# Altium PCB ATRACK_HOST_V1.PcbDoc (part 1 of 3)
Units mm, origin at the board's own origin, x right, y up, seen from the top; angles counter-clockwise.
Board outline 156.4 x 87 mm, 2 copper layers (Top Layer, Bottom Layer); 274 components, 223 nets, 864 pads, 145 vias.
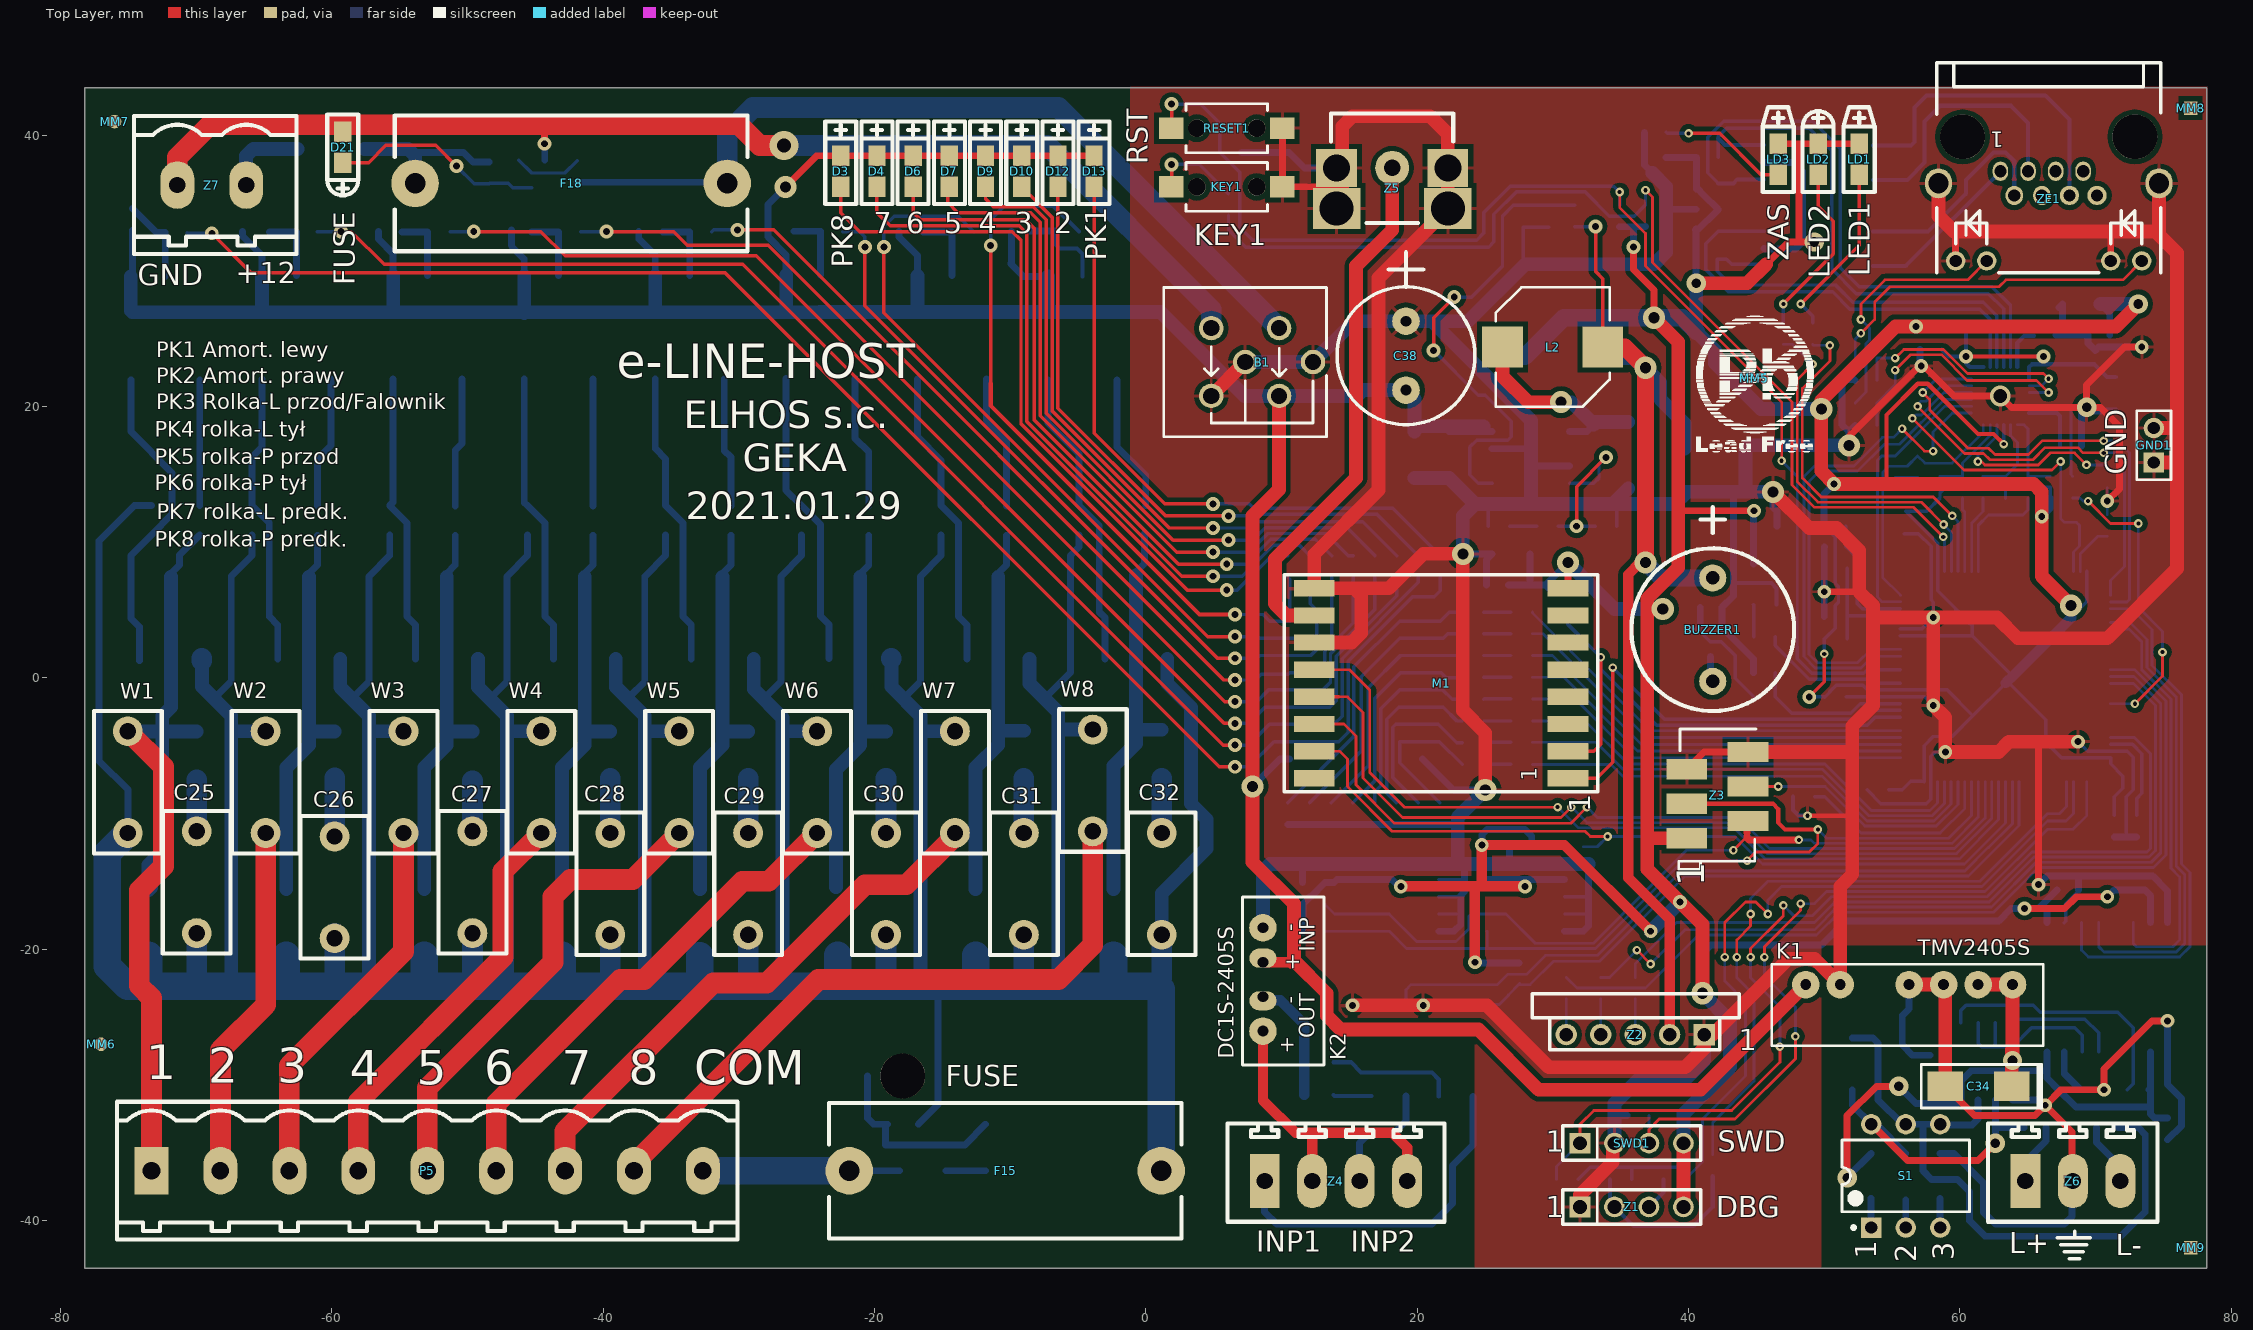
[diagram p0: Top Layer view]
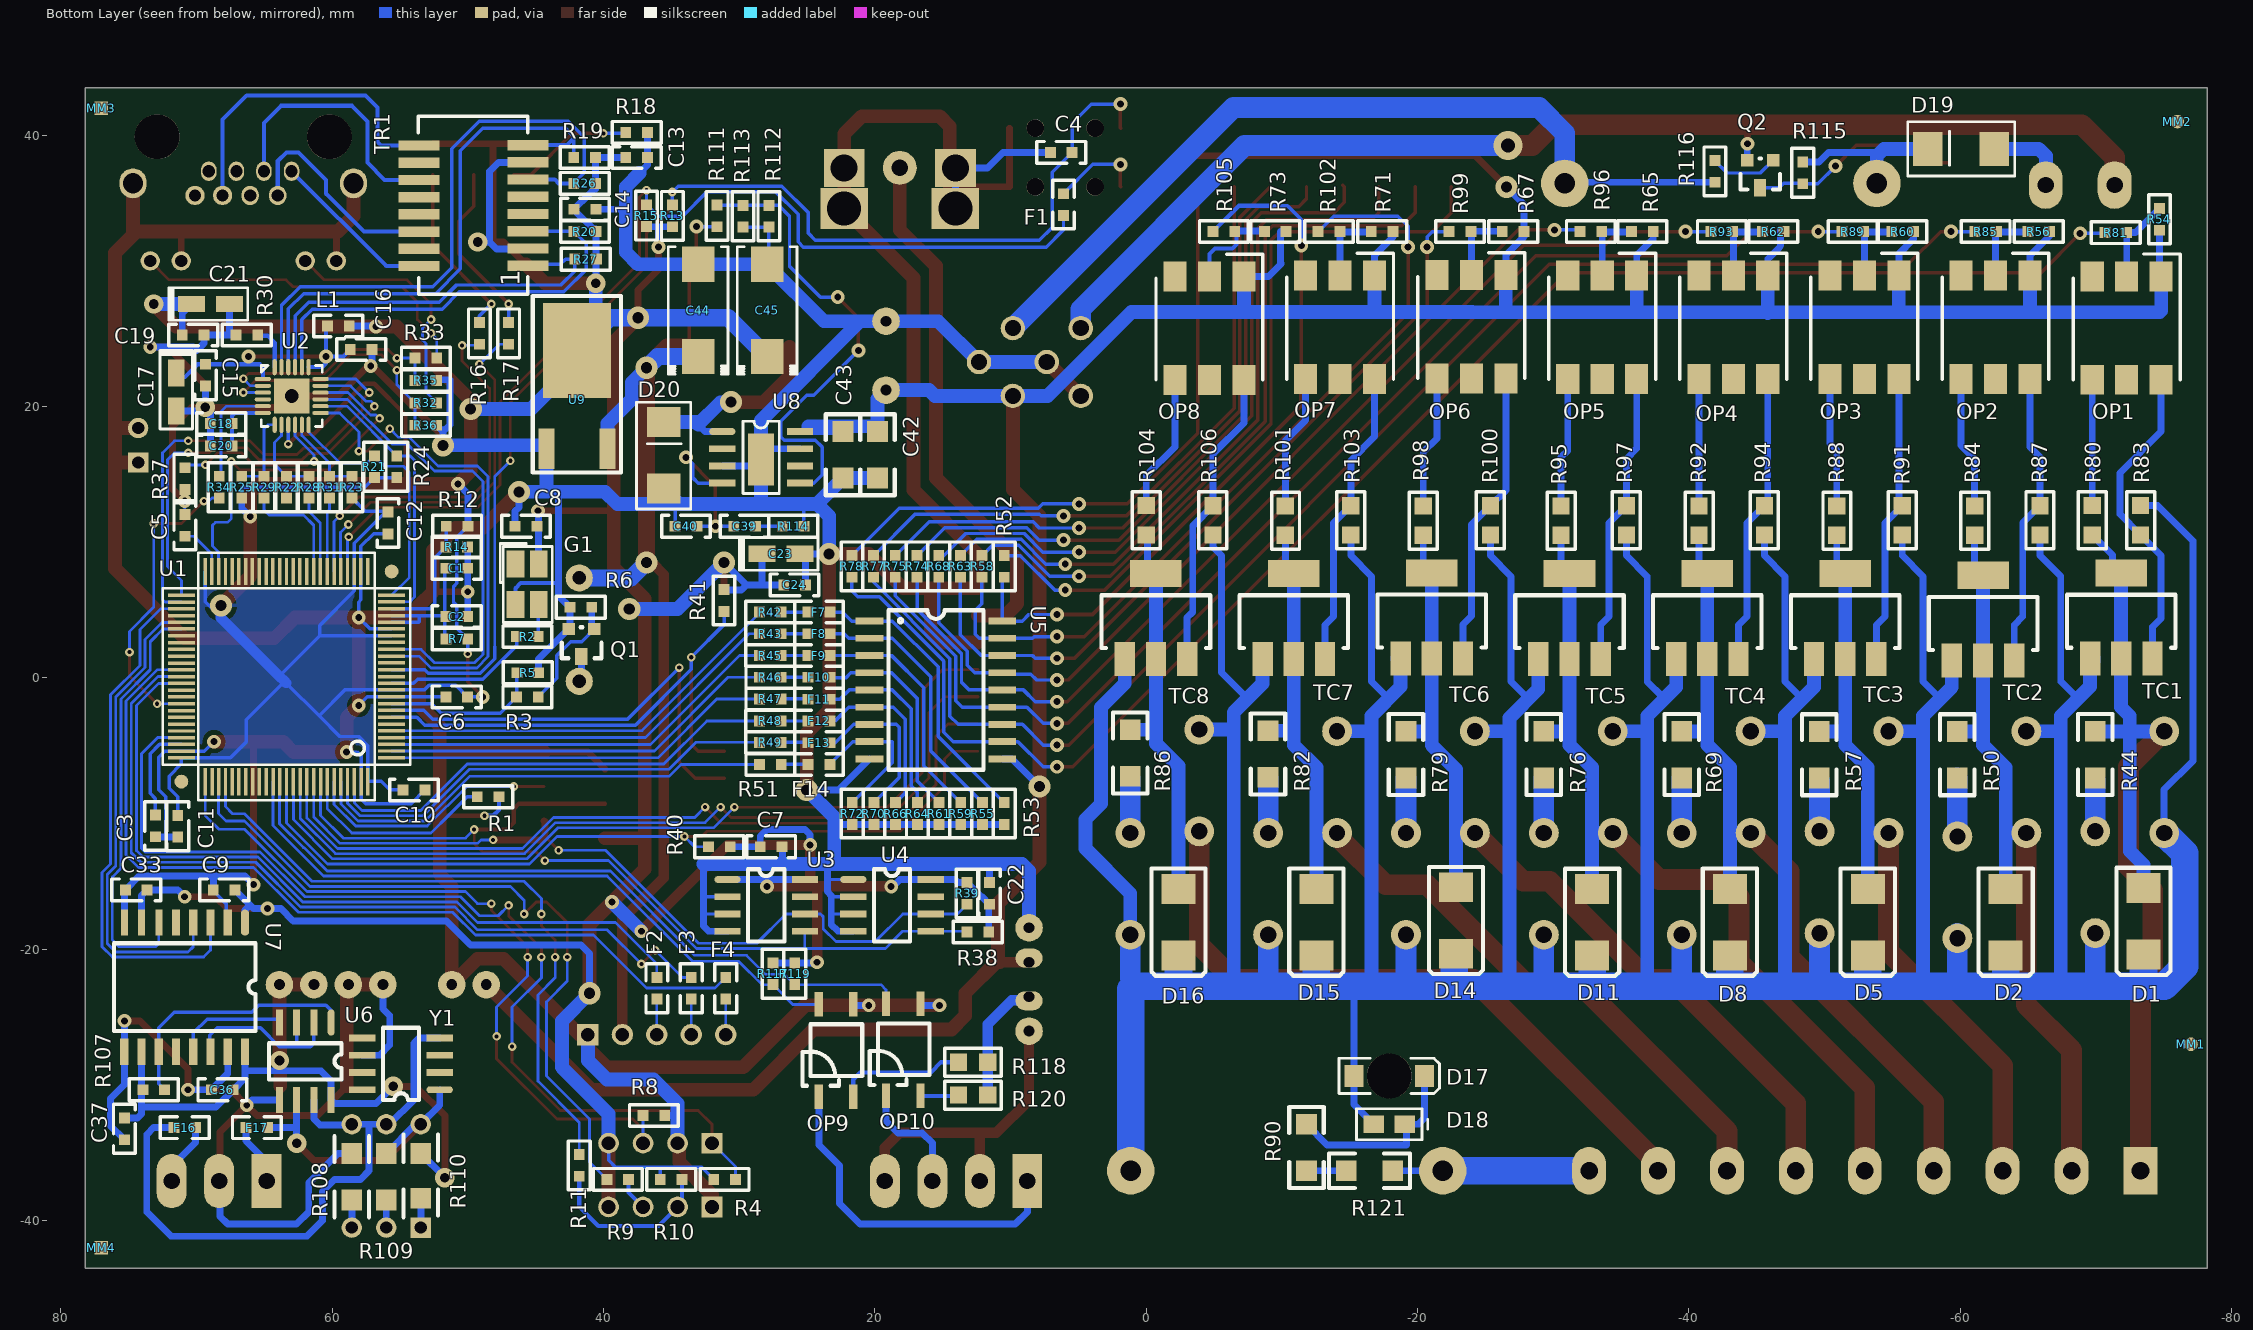
[diagram p1: Bottom Layer view, seen from below]

## Layer stack, top to bottom
Top Layer: signal copper 0.0356
Dielectric: dielectric 0.32, FR-4, Dk 4.8
Bottom Layer: signal copper 0.0356

## Board outline
-78.2,-43.5 -78.2,43.5 78.2,43.5 78.2,-43.5

## Design rules (kind name [scope] priority, off if disabled: settings)
Clearance Clear_Poly [InPolygon vs not InPolygon] p1: gap=0.356
Clearance Clear_INP [InNetClass('Class_INP') vs not InNetClass('Class_INP')] p2: gap=1.727
Clearance Clear_Relays [InNetClass('RELAYS') vs not InNetClass('RELAYS')] p3: gap=2.032
Clearance Clear_RS485 [InNetClass('Class_RS485') vs not InNetClass('Class_RS485')] p4: gap=2.54
Clearance [All] p5: gap=0.178
ComponentClearance [All] p1 off: gap=0.254 collisioncheckmode=3 verticalgap=0.254 showdistances=FALSE
DiffPairsRouting [All] p1: maxlimit=0.254 minlimit=0.254 mostfreqgap=0.254 maxuncoupledlength=12.7
Height [All] p1 off: minheight=0 maxheight=25.4 prefheight=12.7
HoleSize [All] p1: absolutevalues=TRUE maxlimit=5.08 minlimit=0.3 maxpercent=80.000 minpercent=20.000
MatchedLengths "Schematic Matched Net Lengths_1" [InNet('TD_P')] p1: tolerance=7.62 checknetsindiffpair=TRUE checkdiffpairvsdiffpair=TRUE checkothers=TRUE
MatchedLengths "Schematic Matched Net Lengths" [InNet('RD_N')] p2: tolerance=7.62 checknetsindiffpair=TRUE checkdiffpairvsdiffpair=TRUE checkothers=TRUE
MinimumSolderMaskSliver [All] p1: minsoldermaskwidth=0.102
PolygonConnect [All] p1: connectstyle=Relief reliefconductorwidth=0.254 reliefentries=4 polygonreliefangle="90 Angle"
RoutingVias [All] p1: holewidth=0.5 width=1.016 viastyle="Through Hole" minholewidth=0.3 minwidth=0.635 maxholewidth=5.08 maxwidth=5.08
SilkToSilkClearance [All] p1: silktosilkclearance=0.102
SilkscreenOverComponentPads [All] p1: minsilkscreentomaskgap=0.102
SolderMaskExpansion [All] p1: expansion=0.102
Width [All] p1: maxlimit=5.08 minlimit=0.203 preferedwidth=0.254 minimp=50.000000 maximp=50.000000 favimp=50.000000
21 further rules are at their usual default settings.

## Classes and differential pairs
net class Class_RS485: _NC1 _NC2 _NC3 _NC4 _NC5 _RS2 GND_I L+ L- NetF16_2 NetF17_2 NetR108_1 NetR109_1 NetR110_1 RXD1I TXD1I TXD_ENI VCC_I
net class ETHERNET: ERX+ ERX- ETH9 ETH10 ETH11 ETH12 ETH13 ETH14 ETH15 ETH16 ETX+ ETX-
net class RELAYS: _NC6 COM COM_W NetC25_1 NetC26_1 NetC27_1 NetC28_1 NetC29_1 NetC30_1 NetC31_1 NetC32_1 NetD17_A NetOP1_4 NetOP1_6 NetOP2_4 NetOP2_6 NetOP3_4 NetOP3_6 NetOP4_4 NetOP4_6 NetOP5_4 NetOP5_6 NetOP6_4 NetOP6_6 NetOP7_4 NetOP7_6 NetOP8_4 NetOP8_6 NetR90_1 QQ2 QQ4 QQ6 QQ8 QQ10 QQ12 QQ14 QQ16 ST1 ST2 ST3 ST4 ST5 ST6 ST7 ST8
net class Class_INP: NetK2_3 NetK2_4 NetOP9_1 NetOP9_2 NetOP10_1 NetOP10_2
differential pair RD: +RD_P -RD_N
differential pair TD: +TD_P -TD_N

## Components (designator, comment, footprint, x,y, rotation, side; value= is the part's Value field where it differs from the comment)
B1 "BNX002" BNX002 1.326,17.781 r180 top
BUZZER1 "BUZZER" BMT-1205H09B 41.783,7.366 r270 top locked
C1 "2u2" 0603C 51.704,8.077 r0 bottom
C2 "100n" 0603C 51.704,4.521 r0 bottom
C3 "2u2" 0603C 73.025,-11.811 r270 bottom
C4 "10n" 0603C 5.361,38.735 r180 bottom
C5 "2u2" 0603C 70.854,12.141 r90 bottom
C6 "100n" 0603C 49.911,-1.397 r180 bottom
C7 "100n" 0603C 28.548,-12.446 r0 bottom
C8 "100n" 0603C 44.809,11.176 r180 bottom
C9 "100n" 0603C 67.056,-15.621 r180 bottom
C10 "100n" 0603C 54.864,-8.255 r0 bottom
C11 "100n" 0603C 71.374,-10.033 r90 bottom
C12 "100n" 0603C 55.88,12.319 r90 bottom
C13 "100nF" 0603C 36.654,38.354 r180 bottom
C14 "100nF" 0603C 40.464,34.544 r180 bottom
C15 "100nF" 0603C 69.33,21.412 r270 bottom
C16 "100nF" 0603C 56.962,24.206 r180 bottom
C17 "10uF/6v3" CAP_A 71.489,19.679 r90 bottom
C18 "470pF" 0603C 69.076,18.745 r0 bottom
C19 "100nF" 0603C 69.342,25.273 r180 bottom
C20 "2.2uF" 0603C 69.076,17.094 r0 bottom
C21 "10uF/6v3" CAP_A 67.564,27.559 r0 bottom
C22 "100nF" 0603C 11.557,-16.786 r270 bottom
C23 "10u/6.3V" CAP_A 25.527,9.144 r0 bottom
C24 "100n" 0603C 25.019,6.858 r180 bottom
C25 "4n7/3kV" CAP_75 -69.945,-11.309 r90 top
C26 "4n7/3kV" CAP_75 -59.785,-11.69 r90 top
C27 "4n7/3kV" CAP_75 -49.625,-11.309 r90 top
C28 "4n7/3kV" CAP_75 -39.465,-11.429 r90 top
C29 "4n7/3kV" CAP_75 -29.305,-11.429 r90 top
C30 "4n7/3kV" CAP_75 -19.145,-11.429 r90 top
C31 "4n7/3kV" CAP_75 -8.985,-11.429 r90 top
C32 "4n7/3kV" CAP_75 1.175,-11.429 r90 top
C33 "100nF" 0603C 73.533,-15.621 r180 bottom
C34 "100uF/6v3" CAP_C 58.928,-30.099 r0 top
C36 "100nF" 0603C 67.183,-30.353 r180 bottom
C37 "100nF" 0603C 75.311,-32.336 r90 bottom
C38 "1000uF/25V" RB-.2/.4 19.177,26.289 r90 top
C39 "22nF" 0603C 28.702,11.176 r180 bottom
C40 "470p" 0603C 33.02,11.176 r180 bottom
C42 "4u7/25V" 1206#1 19.812,14.732 r270 bottom
C43 "4u7/25V" 1206#1 22.352,14.732 r270 bottom
C44 "470uF/16V" CAP_D 33.02,30.48 r90 bottom
C45 "470uF/16V" CAP_D 27.94,30.48 r90 bottom
D1 "P6SMB400CA-LF" RD5_U -73.501,-15.494 r90 bottom
D2 "P6SMB400CA-LF" RD5_U -63.341,-15.553 r90 bottom
D3 "LED1" 0805LB -22.479,38.481 r90 top
D4 "LED1" 0805LB -19.812,38.481 r90 top
D5 "P6SMB400CA-LF" RD5_U -53.181,-15.553 r90 bottom
D6 "LED1" 0805LB -17.145,38.481 r90 top
D7 "LED1" 0805LB -14.478,38.481 r90 top
D8 "P6SMB400CA-LF" RD5_U -43.021,-15.553 r90 bottom
D9 "LED1" 0805LB -11.811,38.481 r90 top
D10 "LED1" 0805LB -9.144,38.481 r90 top
D11 "P6SMB400CA-LF" RD5_U -32.861,-15.567 r90 bottom
D12 "LED1" 0805LB -6.477,38.481 r90 top
D13 "LED1" 0805LB -3.81,38.481 r90 top
D14 "P6SMB400CA-LF" RD5_U -22.828,-15.426 r90 bottom
D15 "P6SMB400CA-LF" RD5_U -12.541,-15.553 r90 bottom
D16 "P6SMB400CA-LF" RD5_U -2.381,-15.553 r90 bottom
D17 "LED1" LED_LAMP_1 -17.907,-29.337 r180 bottom
D18 "1N4148-0805" 0805D -16.764,-32.893 r0 bottom
D19 "MB1" RD5 -62.103,38.989 r0 bottom
D20 "SK26" RD5 35.56,14.351 r90 bottom
D21 "LED1" 0805LR -59.182,37.973 r270 top
F1 "BLM18BB141SN1D" 0603L#1 6.096,35.787 r90 bottom
F2 "BLM18AG102SN1D" 0603L#2 36.068,-21.971 r270 bottom
F3 "BLM18AG102SN1D" 0603L#2 33.528,-21.971 r270 bottom
F4 "BLM18AG102SN1D" 0603L#2 30.988,-21.971 r270 bottom
F7 "BLM18AG102SN1D" 0603L#1 25.017,4.851 r0 bottom
F8 "BLM18AG102SN1D" 0603L#1 25.017,3.251 r0 bottom
F9 "BLM18AG102SN1D" 0603L#1 25.017,1.651 r0 bottom
F10 "BLM18AG102SN1D" 0603L#1 25.017,0.051 r0 bottom
F11 "BLM18AG102SN1D" 0603L#1 25.017,-1.575 r0 bottom
F12 "BLM18AG102SN1D" 0603L#1 25.017,-3.175 r0 bottom
F13 "BLM18AG102SN1D" 0603L#1 25.017,-4.775 r0 bottom
F14 "BLM18AG102SN1D" 0603L#1 25.017,-6.375 r0 bottom
F15 "FX0321" FX300 1.143,-36.322 r180 top locked
F16 "BLM21A102SPT" 0603L#2 71.755,-33.147 r180 bottom
F17 "BLM21A102SPT" 0603L#2 64.643,-33.147 r0 bottom
F18 "FX0321" FX300 -53.848,36.449 r0 top locked
G1 "CFPS-72-8M" GEN_SMD1_1 46.482,8.382 r90 bottom
GND1 "Header 2" HDR1X2 74.295,15.875 r90 top
K1 "TMV2405S" DCDC-S1_D 48.641,-22.606 r0 top
K2 "DC1S-2405S" DCDC_SIL4 8.636,-18.415 r270 top locked
KEY1 "SW-PB" DTSM31N_2 5.969,36.195 r90 top locked
L1 "BLM18PG121SN1D" 0603L#1 60.44,25.933 r0 bottom
L2 "DER0705-15" DER0705_1 26.289,24.384 r0 top
LD1 "" 0805LG 52.578,39.37 r90 top
LD2 "" 0805LR 49.555,39.361 r90 top
LD3 "" 0805LG 46.609,39.37 r90 top
M1 "RFM69W" RFM69W 31.615,7.603 r180 top
MM1 "" REF_CIR -77,-27 r0 bottom
MM2 "" REF_CIR -76,41 r90 bottom
MM3 "" REF_SQR 77,42 r90 bottom
MM4 "" REF_SQR 77,-42 r90 bottom
MM5 "" PB_FREE_GRAF 44.831,22.098 r0 top
MM6 "" REF_CIR -77,-27 r270 top
MM7 "" REF_CIR -76,41 r270 top
MM8 "" REF_SQR 77,42 r270 top
MM9 "" REF_SQR 77,-42 r270 top
OP1 "MOC3081-SMD" SMD6-OP -74.803,29.591 r0 bottom
OP2 "MOC3081-SMD" SMD6-OP -65.129,29.647 r0 bottom
OP3 "MOC3081-SMD" SMD6-OP -55.469,29.647 r0 bottom
OP4 "MOC3081-SMD" SMD6-OP -45.809,29.647 r0 bottom
OP5 "MOC3081-SMD" SMD6-OP -36.149,29.647 r0 bottom
OP6 "MOC3081-SMD" SMD6-OP -26.503,29.697 r0 bottom
OP7 "MOC3081-SMD" SMD6-OP -16.829,29.647 r0 bottom
OP8 "MOC3081-SMD" SMD6-OP -7.197,29.577 r0 bottom
OP9 "TLP181" TLP181_1 24.13,-30.861 r0 bottom
OP10 "TLP181" TLP181_1 19.177,-30.803 r0 bottom
P5 "Header 9" ARC-9-5.08 -73.279,-36.322 r0 top
Q1 "BC817" SOT23-3Q 41.656,1.397 r270 bottom
Q2 "BC817" SOT23-3Q -45.212,35.941 r270 bottom
R1 "10k" 0603R 49.403,-8.763 r0 bottom
R2 "33R" 0603R 44.704,3.048 r180 bottom
R3 "100R" 0603R 44.704,-1.397 r180 bottom
R4 "10k" 0603R 31.977,-36.957 r0 bottom
R5 "1k" 0603R 46.482,0.381 r0 bottom
R6 "4k7" 0603R 40.767,5.207 r180 bottom
R7 "100R" 0603R 51.704,2.87 r0 bottom
R8 "10k" 0603R 35.384,-32.258 r180 bottom
R9 "33R" 0603R 38.051,-36.957 r180 bottom
R10 "10k" 0603R 34.114,-36.957 r180 bottom
R11 "33R" 0603R 41.783,-36.83 r270 bottom
R12 "10k" 0603R 51.689,11.176 r0 bottom
R13 "10k" 0603R 34.925,33.147 r270 bottom
R14 "1k" 0603R 49.911,9.652 r180 bottom
R15 "10k" 0603R 36.83,34.974 r90 bottom
R16 "4k7" 0603R 49.149,26.289 r90 bottom
R17 "4k7" 0603R 46.99,26.289 r90 bottom
R18 "4k7" 0603R 38.454,40.208 r0 bottom
R19 "50R" 0603R 42.291,38.354 r0 bottom
R20 "50R" 0603R 42.264,32.893 r0 bottom
R21 "4k7" 0603R 56.884,16.459 r90 bottom
R22 "4k7" 0603R 63.361,13.157 r270 bottom
R23 "4k7" 0603R 58.535,13.157 r270 bottom
R24 "4k7" 0603R 55.233,16.459 r90 bottom
R25 "4k7" 0603R 66.663,13.157 r270 bottom
R26 "50R" 0603R 42.291,36.449 r0 bottom
R27 "50R" 0603R 42.213,30.861 r0 bottom
R28 "33R" 0603R 61.71,13.159 r270 bottom
R29 "33R" 0603R 65.012,13.157 r270 bottom
R30 "12k1" 0603R 67.183,25.273 r0 bottom
R31 "33R" 0603R 60.186,13.157 r270 bottom
R32 "1k" 0603R 52.185,20.269 r180 bottom
R33 "1k" 0603R 52.185,23.571 r180 bottom
R34 "33R" 0603R 68.314,13.157 r270 bottom
R35 "10k" 0603R 52.185,21.92 r180 bottom
R36 "10k" 0603R 52.185,18.618 r180 bottom
R37 "4k7" 0603R 70.854,13.794 r270 bottom
R38 "4k7" 0603R 11.508,-18.72 r180 bottom
R39 "4k7" 0603R 13.208,-14.986 r90 bottom
R40 "10k" 0603R 32.358,-12.446 r0 bottom
R41 "10k" 0603R 31.115,6.604 r90 bottom
R42 "100R" 0603R 26.799,4.851 r180 bottom
R43 "100R" 0603R 26.799,3.251 r180 bottom
R44 "39R" 1206#1 -69.95,-3.94 r90 bottom
R45 "100R" 0603R 26.799,1.651 r180 bottom
R46 "100R" 0603R 26.797,0.051 r180 bottom
R47 "100R" 0603R 26.797,-1.549 r180 bottom
R48 "100R" 0603R 26.799,-3.175 r180 bottom
R49 "100R" 0603R 26.799,-4.75 r180 bottom
R50 "39R" 1206#1 -59.79,-3.948 r90 bottom
R51 "100R" 0603R 26.797,-6.375 r180 bottom
R52 "4k7" 0603R 10.465,9.117 r90 bottom
R53 "1k5" 0603R 10.465,-10.895 r270 bottom
R54 "4k7" 0603R -74.676,32.893 r270 bottom
R55 "1k5" 0603R 12.065,-10.895 r270 bottom
R56 "4k7" 0603R -66.675,32.893 r180 bottom
R57 "39R" 1206#1 -49.62,-3.943 r90 bottom
R58 "4k7" 0603R 12.09,9.117 r90 bottom
R59 "1k5" 0603R 13.665,-10.895 r270 bottom
R60 "4k7" 0603R -56.642,32.893 r180 bottom
R61 "1k5" 0603R 15.265,-10.895 r270 bottom
R62 "4k7" 0603R -47.117,32.893 r180 bottom
R63 "4k7" 0603R 13.691,9.117 r90 bottom
R64 "1k5" 0603R 16.866,-10.895 r270 bottom
R65 "4k7" 0603R -37.465,32.893 r180 bottom
R66 "1k5" 0603R 18.466,-10.895 r270 bottom
R67 "4k7" 0603R -27.94,32.893 r180 bottom
R68 "4k7" 0603R 15.291,9.117 r90 bottom
R69 "39R" 1206#1 -39.47,-3.94 r90 bottom
R70 "1k5" 0603R 20.066,-10.895 r270 bottom
R71 "4k7" 0603R -18.288,32.893 r180 bottom
R72 "1k5" 0603R 21.666,-10.895 r270 bottom
R73 "4k7" 0603R -10.414,32.893 r180 bottom
R74 "4k7" 0603R 16.891,9.117 r90 bottom
R75 "4k7" 0603R 18.491,9.117 r90 bottom
R76 "39R" 1206#1 -29.31,-3.94 r90 bottom
R77 "4k7" 0603R 20.091,9.117 r90 bottom
R78 "4k7" 0603R 21.692,9.117 r90 bottom
R79 "39R" 1206#1 -19.15,-3.94 r90 bottom
R80 "360R" 0805R -69.723,12.7 r270 bottom
R81 "1k" 0603R -70.563,32.817 r0 bottom
R82 "39R" 1206#1 -8.98,-3.901 r90 bottom
R83 "330R" 0805R -73.279,12.7 r270 bottom
R84 "360R" 0805R -61.055,12.673 r270 bottom
R85 "1k" 0603R -60.96,32.893 r0 bottom
R86 "39R" 1206#1 1.17,-3.82 r90 bottom
R87 "330R" 0805R -65.881,10.535 r90 bottom
R88 "360R" 0805R -50.895,12.673 r270 bottom
R89 "1k" 0603R -51.181,32.893 r0 bottom
R90 "47k" 1206#1 -11.806,-36.325 r270 bottom
R91 "330R" 0805R -55.721,10.535 r90 bottom
R92 "360R" 0805R -40.735,12.673 r270 bottom
R93 "1k" 0603R -41.529,32.893 r0 bottom
R94 "330R" 0805R -45.561,10.535 r90 bottom
R95 "360R" 0805R -30.575,12.673 r270 bottom
R96 "1k" 0603R -31.877,32.893 r0 bottom
R97 "330R" 0805R -35.401,10.535 r90 bottom
R98 "360R" 0805R -20.415,12.673 r270 bottom
R99 "1k" 0603R -22.225,32.893 r0 bottom
R100 "330R" 0805R -25.368,10.535 r90 bottom
R101 "360R" 0805R -10.255,12.673 r270 bottom
R102 "1k" 0603R -12.573,32.893 r0 bottom
R103 "330R" 0805R -15.081,10.535 r90 bottom
R104 "360R" 0805R 0,12.7 r270 bottom
R105 "1k" 0603R -4.826,32.893 r0 bottom
R106 "330R" 0805R -4.921,10.535 r90 bottom
R107 "10k" 0603R 74.041,-30.353 r0 bottom
R108 "470R" 1206#1 58.552,-38.484 r270 bottom
R109 "120R" 1206#1 56.012,-38.484 r270 bottom
R110 "470R" 1206#2 53.467,-38.354 r270 bottom
R111 "10k" 0603R 31.623,33.147 r270 bottom
R112 "3k3" 0603R 27.813,34.925 r90 bottom
R113 "100k" 0603R 29.718,34.925 r90 bottom
R114 "4k7" 0603R 26.924,11.176 r0 bottom
R115 "2k2" 0603R -48.387,36.322 r270 bottom
R116 "100k" 0603R -41.91,38.227 r90 bottom
R117 "4k7" 0603R 27.508,-22.706 r270 bottom
R118 "1k" 0805R 11.684,-28.321 r0 bottom
R119 "4k7" 0603R 25.908,-22.706 r270 bottom
R120 "1k" 0805R 11.684,-30.734 r0 bottom
R121 "47k" 1206#1 -18.164,-36.327 r180 bottom
RESET1 "SW-PB" DTSM31N_2 5.969,40.513 r270 top locked
S1 "SW DIP-3" DIP-6 56.007,-36.703 r90 top
SWD1 "ST-LINK" PIN4 32.004,-34.29 r0 top
TC1 "Z0103MN" SOT223 -71.864,1.427 r0 bottom
TC2 "Z0103MN" SOT223 -61.676,1.27 r0 bottom
TC3 "Z0103MN" SOT223 -51.516,1.391 r0 bottom
TC4 "Z0103MN" SOT223 -41.356,1.391 r0 bottom
TC5 "Z0103MN" SOT223 -31.196,1.391 r0 bottom
TC6 "Z0103MN" SOT223 -21.05,1.441 r0 bottom
TC7 "Z0103MN" SOT223 -10.876,1.391 r0 bottom
TC8 "Z0103MN" SOT223 -0.716,1.391 r0 bottom
TR1 "H1102NL" H1102 45.568,30.378 r270 bottom
U1 "STM32F427VGT6" VQ100_2 55.614,-5.893 r90 bottom
U2 "LAN8742A-CZ-TR" QFN24_LAN 62.98,20.777 r0 bottom
U3 "FM24CL64B-GTR" SO8 30.861,-14.859 r180 bottom
U4 "24AA256UID-I/SN" SO8 21.59,-14.859 r180 bottom
U5 "ULN2803A" SO-18 20.396,4.191 r90 bottom
U6 "MAX485" SO8 60.071,-25.4 r270 bottom
U7 "ADUM1401CRWZ" SMD16B 66.421,-18.034 r180 bottom
U8 "L5973D_2" SO8_M 31.242,18.161 r90 bottom
U9 "LD1117V33" DPAK 44.196,16.891 r0 bottom
W1 "JVR10N391K" CAP_75 -75.025,-11.429 r270 top
W2 "JVR10N391K" CAP_75 -64.865,-3.929 r90 top
W3 "JVR10N391K" CAP_75 -54.705,-3.929 r90 top
W4 "JVR10N391K" CAP_75 -44.545,-3.929 r90 top
W5 "JVR10N391K" CAP_75 -34.385,-3.929 r90 top
W6 "JVR10N391K" CAP_75 -24.225,-3.929 r90 top
W7 "JVR10N391K" CAP_75 -14.065,-3.929 r90 top
W8 "JVR10N391K" CAP_75 -3.905,-3.809 r90 top
Y1 "TPN3021" SO8 52.07,-30.353 r0 bottom
Z1 "DBG" PIN4 32.004,-38.989 r0 top
Z2 "NCDW-05" KEY_LOG 41.148,-26.289 r270 top
Z3 "Header 6" UMATCH-6SMD 39.878,-11.811 r90 top
Z4 "ZL-4" ARC-4-3.5-TYCO-1 8.763,-37.084 r0 top locked
Z5 "SMA-20" SMA-20_1 18.161,37.592 r180 top locked
Z6 "CON3" ARC-3-3.5-TYCO-1 64.826,-37.084 r0 top
Z7 "CON2" ARC-2-5.08-A1 -71.374,36.322 r0 top
ZE1 "WURTH 615 008 137 421" RJ45GELED 72.898,39.878 r180 top locked

## Footprints (in the part's own frame and the unit in brackets; to place one, negate y for a bottom-side part, rotate by r counter-clockwise, add the part's x,y. Pads: shape width x height; smd on the part's side, far side on the other; paste and mask are expansions set on the pad)
0603C [mm]
  rect 0.8x0.8 smd: 1(-0.1,0) 2(-1.7,0)
  silkscreen extent -2.7,-0.8 0.9,0.8
0603L#1 [mm]
  rect 0.8x0.8 smd: 1(-0.1,0) 2(-1.7,0)
  silkscreen extent -2.7,-0.8 0.9,0.8
0603L#2 [mm]
  rect 0.8x0.8 smd: 1(0.1,0) 2(1.7,0)
  silkscreen extent -0.9,-0.8 2.7,0.8
0603R [mm]
  rect 0.8x0.8 smd: 1(-0.1,0) 2(-1.7,0)
  silkscreen extent -2.7,-0.8 0.9,0.8
0805D [mil]
  rect 60x50 smd: A(0,0) K(-90,0)
  silkscreen extent -157,-45 50,45
0805LB [mil]
  rect 60x50 smd: A(0,0) K(-90,0)
  silkscreen extent -140,-45 100,45
0805LG [mil]
  rect 60x50 smd: A(0,0) K(-90,0)
  silkscreen extent -140,-45 106,45
0805LR [mil]
  rect 60x50 smd: A(0,0) K(-90,0)
  silkscreen extent -140,-45 95,45
0805R [mil]
  rect 50x50 smd: 1(0,0) 2(85,0)
  silkscreen extent -40,-40 125,41
1206#1 [mil]
  rect 60x60 smd: 1(-0.13,0.21) 2(-135.13,0.21)
  silkscreen extent -185,-50 50,50
1206#2 [mil]
  rect 60x60 smd: 1(-0.13,0.21) 2(-130,0)
  silkscreen extent -185,-50 50,50
ARC-2-5.08-A1 [mm]
  oval 2.5x3.5 hole 1.2: 1(0,0) 2(5.08,0)
  silkscreen extent -3.2,-5.08 8.79,5.08
ARC-3-3.5-TYCO-1 [mm]
  rect 2.2x4 hole 1.2: 1(0,0)
  oval 2.2x4 hole 1.2: 2(3.5,0) 3(7,0)
  silkscreen extent -2.75,-3 9.75,4.25
ARC-4-3.5-TYCO-1 [mm]
  rect 2.2x4 hole 1.2: 1(0,0)
  oval 2.2x4 hole 1.2: 2(3.5,0) 3(7,0) 4(10.5,0)
  silkscreen extent -2.75,-3 13.25,4.25
ARC-9-5.08 [mm]
  rect 2.5x3.5 hole 1.3: 1(0,0)
  oval 2.5x3.5 hole 1.3: 2(5.08,0) 3(10.16,0) 4(15.24,0) 5(20.32,0) 6(25.4,0) 7(30.48,0) 8(35.56,0) 9(40.64,0)
  silkscreen extent -2.54,-5.08 43.18,5.08
BMT-1205H09B [mm]
  round 2 hole 1: 1(0,0) 2(7.62,0)
  silkscreen extent -5.21,-6 9.81,6
BNX002 [mm]
  round 1.8 hole 1.2: B(-8.5,-8) CB(-8.5,-3) CG1(-3.5,-3) CG2(-6,-5.5) CG3(-11,-5.5) PSG(-3.5,-8)
  silkscreen extent -12,-11 0,0
CAP_75 [mm]
  round 2.2 hole 1.2: 1(0,0) 2(-7.5,0)
  silkscreen extent -9,-2.5 1.5,2.5
CAP_A [mm]
  rect 2x1.2 smd: 1(0,0) 2(2.8,0)
  silkscreen extent -1.34,-1.2 4.45,1.2
CAP_C [mm]
  rect 2.6x2.2 smd: 1(0,0) 2(4.9,0)
  silkscreen extent -1.78,-1.6 7.11,1.6
CAP_D [mm]
  rect 2.6x2.4 smd: 1(0,0) 2(-6.8,0)
  silkscreen extent -8.1,-2.2 1.3,2.2
DCDC-S1_D [mil]
  round 80 hole 31.5: 1(0,0) 2(100,0) 4(300,0) 5(400,0) 6(500,0) 7(600,0)
  silkscreen extent -98,-177 689,59
DCDC_SIL4 [mm]
  round 2.032 hole 0.8: 1(0,0) 4(7.62,0)
  oval 1.4x2 hole 0.8 copper offset -0.3,0: 2(2.54,0)
  oval 1.4x2 hole 0.8 copper offset 0.3,0: 3(5.08,0)
  silkscreen extent -2.26,-1.5 10.12,4.5
DER0705_1 [mm]
  rect 3x3 smd: 1(0,0) 2(7.4,0)
  silkscreen extent -0.5,-4.4 7.9,4.4
DIP-6 [mm] "DIP; 6 Leads; Row Spacing 7.62 mm; Pitch 2.54 mm"
  rect 1.5x1.5 hole 0.9: 1(-3.81,2.54)
  round 1.5 hole 0.9: 2(-3.81,0) 3(-3.81,-2.54) 4(3.81,-2.54) 5(3.81,0) 6(3.81,2.54)
  silkscreen extent -3.93,-4.7 2.65,4.7, body extent -3.55,-4.7 3.55,4.7, height 5.46
DPAK [mil]
  rect 47x118 smd: 1(0,0) 3(-177,0)
  rect 197x276 smd: 2(-88,-285)
  silkscreen extent -216,-443 40,69
DTSM31N_2 [mm]
  round 1.3 hole 1.3 mask+0: 0(0,2.2) 0(0,-2.2)
  rect 1.6x1.8 smd: 1(0,4.1) 2(0,-4.1)
  silkscreen extent -1.8,-3 1.8,3
FX300 [mm]
  round 3.5 hole 1.499: 1(0,0) 2(23,0)
  silkscreen extent -1.5,-5 24.5,5
GEN_SMD1_1 [mm]
  rect 2x1.3 smd: 1(0,0) 2(-2.972,0) 3(-2.972,-1.702) 4(0,-1.702)
  silkscreen extent -4.3,-2.7 1.52,1.12
H1102 [mm]
  rect 0.76x3 smd: 1(0,0) 2(-1.27,0) 3(-2.54,0) 4(-3.81,0) 5(-5.08,0) 6(-6.35,0) 7(-7.62,0) 8(-8.89,0) 9(-8.865,-8.026) 10(-7.595,-8.026) 11(-6.325,-8.026) 12(-5.055,-8.026) 13(-3.785,-8.026) 14(-2.515,-8.026) 15(-1.245,-8.026) 16(0.025,-8.026)
  silkscreen extent -11.02,-8.08 2.11,0
HDR1X2 [mm] "Connector; Header; 2 Position"
  rect 1.5x1.5 hole 0.9: 1(0,0)
  round 1.5 hole 0.9: 2(2.54,0)
  silkscreen extent -1.27,-1.27 3.81,1.27
KEY_LOG [mil]
  rect 62x62 hole 39.37: 1(0,0)
  round 62 hole 39.37: 2(0,-100) 3(0,-200) 4(0,-300) 5(0,-400)
  silkscreen extent -118,-498 43,102
LED_LAMP_1 [mm]
  round 3.3 hole 3.3 unplated mask+0: 0(0,0)
  rect 1.4x1.6 smd: A(2.6,0) K(-2.6,0)
  silkscreen extent -3.7,-1.3 3.7,1.3
PB_FREE_GRAF [mm]
  silkscreen extent -4.29,-5.46 4.43,4.59
PIN4 [mil]
  rect 60x60 hole 40: 1(0,0)
  round 60 hole 40: 2(100,0) 3(200,0) 4(300,0)
  silkscreen extent -50,-50 350,50
QFN24_LAN [mm]
  oval 1.2x0.3 smd mask+0.152: 1(2.125,-1.25) 2(2.125,-0.75) 3(2.125,-0.25) 4(2.125,0.25) 5(2.125,0.75) 6(2.125,1.25) 13(-2.125,1.25) 14(-2.125,0.75) 15(-2.125,0.25) 16(-2.125,-0.25) 17(-2.125,-0.75) 18(-2.125,-1.25)
  oval 0.3x1.2 smd mask+0.152: 7(1.25,2.125) 8(0.75,2.125) 9(0.25,2.125) 10(-0.25,2.125) 11(-0.75,2.125) 12(-1.25,2.125) 19(-1.25,-2.125) 20(-0.75,-2.125) 21(-0.25,-2.125) 22(0.25,-2.125) 23(0.75,-2.125) 24(1.25,-2.125)
  rect 2.6x2.6 smd mask+0.152: 25(0,0)
  silkscreen extent -2.25,-2.25 2.25,2.25
RB-.2/.4 [mil]
  round 80 hole 31.5: 1(0,0) 2(-200,0)
  silkscreen extent -300,-200 200,200
RD5 [mm]
  rect 2.2x2.5 smd: A(-0.4,0) K(4.5,0)
  silkscreen extent -1.91,-2 5.97,2
RD5_U [mm]
  rect 2.2x2.5 smd: A(0,0) K(-4.9,0)
  silkscreen extent -6.4,-2 1.5,2
REF_CIR [mm]
  round 1 smd paste-0.5 mask+0.5: 0(0,0)
REF_SQR [mm]
  rect 1x1 smd paste-0.5 mask+0.5: ""(0,0)
RFM69W [mm]
  rect 3x1.2 smd: 1(0.5,15) 2(0.5,13) 3(0.5,11) 4(0.5,9) 5(0.5,7) 6(0.5,5) 7(0.5,3) 8(0.5,1) 9(19.2,1) 10(19.2,3) 11(19.2,5) 12(19.2,7) 13(19.2,9) 14(19.2,11) 15(19.2,13) 16(19.2,15)
  silkscreen extent -1.7,0 21.4,16
RJ45GELED [mil]
  round 129.92 hole 129.92: 0(0,0) 0(500,0)
  oval 45x56 hole 35.43: 1(390,100) 3(310,100) 5(230,100) 7(150,100)
  oval 50x56 hole 35.43: 2(350,170) 4(270,170)
  round 56 hole 35.43: 6(190,170) 8(110,170) 9(520,360) 10(430,360) 11(70,360) 12(-20,360)
  oval 78.74x86.61 hole 59.06: G1(-70,135) G2(570,135)
  silkscreen extent -75,-215 575,395
SMA-20_1 [mm]
  round 2.5 hole 1.2: 1(0,0)
  rect 3.5x3 hole 2.5: G1(-4.1,3) G3(4.1,3)
  rect 3x2.8 hole 2: G2(-4.1,0) G4(4.1,0)
  silkscreen extent -4.5,-4 4.5,4.06
SMD6-OP [mm]
  rect 1.7x2.2 smd: 1(0,0) 2(2.54,0) 3(5.08,0) 4(5.08,7.62) 5(2.54,7.62) 6(0,7.62)
  silkscreen extent -1.4,-1.65 6.48,7.62
SMD16B [mil]
  oval 24x76 smd: 1(0,0)
  rect 24x76 smd: 2(-50,0) 3(-100,0) 4(-150,0) 5(-200,0) 9(-350,-375) 10(-300,-375) 11(-250,-375) 12(-200,-375) 13(-150,-375) 14(-100,-375) 15(-50,-375) 16(0,-375)
  rect 20x76 smd: 6(-250,0) 7(-300,0) 8(-350,0)
  silkscreen extent -380,-315 30,-60
SO8 [mil]
  oval 76x20 smd: 1(0,0)
  rect 76x20 smd: 2(0,-50) 3(0,-100) 4(0,-150) 5(225,-150) 6(225,-100) 7(225,-50) 8(225,0)
  silkscreen extent 60,-180 165,30
SO8_M [mil]
  oval 20x76 smd: 1(0,0)
  rect 20x76 smd: 2(-50,0) 3(-100,0) 4(-150,0) 5(-150,-225) 6(-100,-225) 7(-50,-225) 8(0,-225)
  rect 150x75 smd: 9(-81,-112)
  silkscreen extent -180,-165 30,-60
SO-18 [mil]
  rect 20x80 smd: 1(0,0) 2(-50,0) 3(-100,0) 4(-150,0) 5(-200,0) 6(-250,0) 7(-300,0) 8(-350,0) 9(-400,0) 10(-400,-385.83) 11(-350,-385.83) 12(-300,-385.83) 13(-250,-385.83) 14(-200,-385.83) 15(-150,-385.83) 16(-100,-385.83) 17(-50,-385.83) 18(0,-385.83)
  silkscreen extent -431,-331 31,-55
SOT23-3Q [mil]
  rect 36x36 smd: B(-87,39) E(-87,-36)
  rect 50x36 smd: C(-7,1)
  silkscreen extent -92,-56 -2,59
SOT223 [mm]
  rect 1.5x2.5 smd: 1(2.3,0) 2(0,0) 3(-2.3,0)
  rect 3.8x2 smd: 4(0,-6.3)
  silkscreen extent -4,-4.7 4,-0.8
TLP181_1 [mm]
  rect 0.6x1.8 smd: 1(0,0) 2(-2.54,0) 3(-2.54,-6.8) 4(0,-6.8)
  silkscreen extent -3.2,-5.33 1.2,-0.8
UMATCH-6SMD [mm]
  rect 1.5x3 smd: 1(0,0) 2(1.27,-4.5) 3(2.54,0) 4(3.81,-4.5) 5(5.08,0) 6(6.35,-4.5)
  silkscreen extent -2.3,-5.1 8.05,0.6
VQ100_2 [mil]
  rect 10x79 smd mask+6: 1(0,0) 2(20,0) 3(39,0) 4(59,0) 5(79,0) 6(98,0) 7(118,0) 8(138,0) 9(157,0) 10(177,0) 11(197,0) 12(216,0) 13(236,0) 14(256,0) 15(276,0) 16(295,0) 17(315,0) 18(335,0) 19(354,0) 20(374,0) 21(394,0) 22(413,0) 23(433,0) 24(453,0) 25(472,0) 51(472,610) 52(452,610) 53(433,610) 54(413,610) 55(393,610) 56(374,610) 57(354,610) 58(334,610) 59(315,610) 60(295,610) 61(275,610) 62(256,610) 63(236,610) 64(216,610) 65(196,610) 66(177,610) 67(157,610) 68(137,610) 69(118,610) 70(98,610) 71(78,610) 72(59,610) 73(39,610) 74(19,610) 75(0,610)
  rect 79x10 smd mask+6: 26(541,69) 27(541,89) 28(541,108) 29(541,128) 30(541,148) 31(541,167) 32(541,187) 33(541,207) 34(541,226) 35(541,246) 36(541,266) 37(541,285) 38(541,305) 39(541,325) 40(541,345) 41(541,364) 42(541,384) 43(541,404) 44(541,423) 45(541,443) 46(541,463) 47(541,482) 48(541,502) 49(541,522) 50(541,541) 76(-69,541) 77(-69,521) 78(-69,502) 79(-69,482) 80(-69,462) 81(-69,443) 82(-69,423) 83(-69,403) 84(-69,384) 85(-69,364) 86(-69,344) 87(-69,325) 88(-69,305) 89(-69,285) 90(-69,265) 91(-69,246) 92(-69,226) 93(-69,206) 94(-69,187) 95(-69,167) 96(-69,147) 97(-69,128) 98(-69,108) 99(-69,88) 100(-69,69)
  round 40 smd: 101(541,0) 102(-68.9,610)
  silkscreen extent -123,-54 595,664

## Part data
C1 C2 C3 C4 C5 C6 C7 C8 C9 C10 C11 C12 C22 C24 C39 C40: library part CAP, "Capacitor"
C13 C14 C15 C16 C19: library part Cap_100nF_X7R_10%_0402, "Capacitor,100nF,16V,X7R,10%,0402,YAGEO"
C17 C21: library part CapTantal
C18: library part Cap_470pF_X7R_10%_0402, "Capacitor,470pF,16V,X7R,10%,0402,YAGEO"
C20: library part Cap_1uF_X5R_10%_0603, "Capacitor,1uF,16V,X5R,10%,0603,YAGEO"
C23 C34 C38 C44 C45: library part CAP_TANTAL_SMD, "KONDENSATOR ELEKTROLITYCZNY TANTALOWY SMD"
C25 C26 C27 C28 C29 C30 C31 C32 C33 C36 C37 C42 C43: library part CAP
D1 D2 D5 D8 D11 D14 D15 D16: library part TRANSIL
D18: library part DIODE1, "Diode"
D19: library part Diode, "Default Diode"
D20: library part "DIODE SCHOTTKY", "Schottky Diode"
F1 F2 F3 F4 F7 F8 F9 F10 F11 F12 F13 F14 F16 F17: library part KORALIK, "Koralik ferrytowy"
F15 F18: library part FUSE1, "Fuse"
G1: library part GENER_SMD
GND1: "Header, 2-Pin"
K1: library part NMV0505S_D
K2: library part DCDC_AM1S
L1: library part BEAD_120R_2A_0603, "Bead,120R,2A,0603,BLM18PG121SN1D,MURATA"
L2: library part CEWKA_1
LD1 LD2 LD3: library part LED
M1: library part RFM96W
MM1 MM2 MM3 MM4 MM5 MM6 MM7 MM8 MM9: library part MECH
OP1 OP2 OP3 OP4 OP5 OP6 OP7 OP8: library part MOC3041
OP9 OP10: library part TLP621, "Optoisolator"
P5: "Header, 9-Pin"
Q1 Q2: library part NPN-SOT23, "NPN Transistor"
R1 R2 R4 R7 R8 R9 R10 R11 R12 R13 R14 R15 R16 R17 R18 R19 R20 R21 R22 R23 R24 R25 R26 R27 R28 R29 R30 R31 R32 R33 R34 R35 R36 R37 R38 R39 R40 R41 R42 R43 R44 R45 R46 R47 R48 R49 R50 R51 R52 R53 R54 R55 R56 R57 R58 R59 R60 R61 R62 R63 R64 R65 R66 R67 R68 R69 R70 R71 R72 R73 R74 R75 R76 R77 R78 R79 R80 R81 R82 R83 R84 R85 R86 R87 R88 R89 R90 R91 R92 R93 R94 R95 R96 R97 R98 R99 R100 R101 R102 R103 R104 R105 R106 R107 R108 R109 R110 R111 R112 R113 R114 R115 R116 R117 R118 R119 R120 R121: library part RES3
R3 R5 R6: library part R
S1: "DIP Switch, 3 Position, SPST"
SWD1: library part SW_CON, "Header, 4-Pin"
U1: library part STM32F427_LQFP100
U2: "LAN8742A-CZ-TR - Small Footprint RMII 10/100 Ethernet, Transceiver with HP Auto-MDIX and flexPWR Technology SQFN-24"
U3 U4: library part AT24C02
U5: library part Pro31.tmp_ULN2803A_42
U6: library part MAX485_1
U7: library part ADUM1401
W1 W2 W3 W4 W5 W6 W7 W8: library part RES4
Z1: library part "Header 4", "Header, 4-Pin"
Z2: library part CON5, "Connector"
Z3: "Micro Match 6"
Z6: library part ZL-3
Z7: "Connector"
ZE1: library part RJ45GELED

## Via types
v1: diameter 1.016, hole 0.508, Top Layer to Bottom Layer, tented both sides, 58 vias
v2: diameter 0.635, hole 0.305, Top Layer to Bottom Layer, tented both sides, 39 vias
v3: diameter 0.635, hole 0.3, Top Layer to Bottom Layer, tented both sides, 18 vias
v4: diameter 1.626, hole 0.813, Top Layer to Bottom Layer, tented both sides, 15 vias
v5: diameter 1.422, hole 0.711, Top Layer to Bottom Layer, tented both sides, 7 vias
v6: diameter 1.016, hole 0.5, Top Layer to Bottom Layer, tented both sides, 5 vias
v7: diameter 2.134, hole 1.016, Top Layer to Bottom Layer, tented both sides, 1 vias
v8: diameter 1.524, hole 1, Top Layer to Bottom Layer, tented both sides, 1 vias
v9: diameter 1.422, hole 0.7, Top Layer to Bottom Layer, tented both sides, 1 vias

## Nets (pads, with @x,y where several pads share a name; then routed paths per layer and width w, separated by ;. In a path a pad name is that pad's centre, name@x,y a point inside that pad or via, vN(x,y) a via of type N, cw(c..) or ccw(c..) an arc to the next point about the centre after c; other vN are vias at no path point)
/RST: C4.1 R13.2 RESET1.2 U1.14 | length 94.3
  Top Layer w0.203: v2(34.925,35.814) 34.925,34.671 36.83,32.766 36.83,30.353 46.863,20.32 v2(46.863,16.002)
  Top Layer w0.254: RESET1.2@1.869,40.513 1.905,40.549 v1(1.905,42.291)
  Bottom Layer w0.203: v2(46.863,16.002) 48.006,14.859 48.006,2.286
  Bottom Layer w0.254: v1(1.905,42.291) 4.064,42.291 5.461,40.894 C4.1@5.461,38.735 6.936,37.26 6.936,33.196 7.874,32.258 24.384,32.258 24.892,32.766 24.892,34.29 26.848,36.246 34.493,36.246 v2(34.925,35.814) R13.2@34.925,34.847 ; 48.006,2.286 48.006,1.397 49.073,0.33 52.908,0.33 53.188,0.61 U1.14@55.614,0.61
_NC1: Y1.2
_NC2: Y1.3
_NC3: Y1.5
_NC4: Y1.7
_NC5: Y1.8
_NC6: D17.0
_RS2: U7.12
ANT: M1.10 Z5.1 | length 39
  Top Layer w1.016: M1.10@12.415,4.603 10.383,4.603 9.525,5.461 9.525,8.763 15.494,14.732 15.494,30.353 18.161,33.02 Z5.1@18.161,37.592
BOOT0: R1.1 U1.94 | length 14.9
  Bottom Layer w0.203: 51.943,-10.668 52.705,-11.43 58.547,-11.43 60.364,-9.613 U1.94@60.364,-7.645
  Bottom Layer w0.254: R1.1@49.303,-8.763 50.038,-8.763 51.943,-10.668
BUZZER: R3.2 R5.1 U1.9 | length 11.8
  Bottom Layer w0.254: R5.1@46.382,0.381 46.382,-1.375 R3.2@46.404,-1.397 47.623,-2.616 51.943,-2.616 52.654,-1.905 U1.9@55.614,-1.905
CLK: R2.2 U1.12 | length 11
  Bottom Layer w0.254: R2.2@46.404,3.048 46.404,2.388 48.894,-0.102 53.696,-0.102 54,-0.406 U1.12@55.614,-0.406
COM: C25.2 C26.2 C27.2 C28.2 C29.2 C30.2 C31.2 C32.2 D1.K D2.K D5.K D8.K D11.K D14.K D15.K D16.K D17.K D18.A F15.1 R83.1 R87.1 R91.1 R94.1 R97.1 R100.1 R103.1 R106.1 TC1.1 TC2.1 TC3.1 TC4.1 TC5.1 TC6.1 TC7.1 TC8.1 W1.1 W2.1 W3.1 W4.1 W5.1 W6.1 W7.1 W8.1 | length 494.6
  Bottom Layer w0.508: W1.1@-75.025,-11.429 -75.025,-8.236 -77.141,-6.12 -77.141,10.108 -74.549,12.7 R83.1@-73.279,12.7 ; -68.548,-1.403 -67.405,-0.26 -67.405,7.487 -65.881,9.011 R87.1@-65.881,10.535 ; -58.388,-1.403 -57.245,-0.26 -57.245,7.487 -55.721,9.011 R91.1@-55.721,10.535 ; -48.228,-1.403 -47.085,-0.26 -47.085,7.487 -45.561,9.011 R94.1@-45.561,10.535 ; -38.068,-1.403 -36.925,-0.26 -36.925,7.487 -35.401,9.011 R97.1@-35.401,10.535 ; -28.035,-1.403 -26.892,-0.26 -26.892,7.487 -25.368,9.011 R100.1@-25.368,10.535 ; -17.748,-1.403 -16.605,-0.26 -16.605,7.487 -15.081,9.011 R103.1@-15.081,10.535 ; D18.A@-16.764,-32.893 -15.307,-31.436 D17.K@-15.307,-29.337 -15.307,-22.806 -15.24,-22.739 ; -7.477,-1.514 -5.556,0.406 -5.556,9.011 -4.921,9.646 R106.1@-4.921,10.535
  Bottom Layer w1.016: TC1.1@-69.564,1.264 -69.564,-0.641 -67.405,-2.8 -67.405,-22.688 ; -67.398,-3.929 W2.1@-64.865,-3.929 ; TC2.1@-59.376,1.391 TC2.1@-59.376,1.27 -59.376,-0.669 -57.245,-2.8 -57.245,-22.663 -57.321,-22.739 ; -57.238,-3.929 W3.1@-54.705,-3.929 ; TC3.1@-49.216,1.391 -49.216,-0.669 -47.085,-2.8 -47.085,-22.739 ; -47.078,-3.929 W4.1@-44.545,-3.929 ; TC4.1@-39.056,1.391 -39.056,-0.669 -36.925,-2.8 -36.925,-22.739 ; -36.918,-3.929 W5.1@-34.385,-3.929 ; TC5.1@-28.896,1.391 -28.896,-0.821 -26.765,-2.952 -26.765,-22.663 -26.689,-22.739 ; -26.758,-3.929 W6.1@-24.225,-3.929 ; TC6.1@-18.75,1.441 -18.75,-0.655 -16.605,-2.8 -16.605,-22.663 -16.529,-22.739 ; -16.598,-3.929 W7.1@-14.065,-3.929 ; TC7.1@-8.576,1.391 -8.576,-0.415 -7.477,-1.514 -6.445,-2.546 -6.445,-22.739 ; -6.438,-3.809 W8.1@-3.905,-3.809 ; C32.2@1.175,-18.929 1.175,-15.881 4.477,-12.579 4.477,-10.42 3.334,-9.277 3.334,-2.165 1.584,-0.415 TC8.1@1.584,1.391
  Bottom Layer w1.524: -69.945,-21.977 C25.2@-69.945,-18.929 ; TC1.1@-69.564,1.264 TC1.1@-69.564,1.427 ; -59.785,-22.612 C26.2@-59.785,-19.19 C26.2@-59.785,-18.823 ; -49.625,-22.739 C27.2@-49.625,-18.929 ; -39.465,-22.612 C28.2@-39.465,-18.929 ; -29.305,-22.612 C29.2@-29.305,-18.929 ; -19.145,-22.739 C30.2@-19.145,-18.929 ; TC6.1@-18.764,1.427 TC6.1@-18.75,1.441 ; -8.985,-22.739 C31.2@-8.985,-18.929 ; 1.175,-22.104 C32.2@1.175,-18.929
  Bottom Layer w2.032: W1.1@-75.025,-11.429 -76.529,-12.933 -76.529,-21.235 -75.025,-22.739 -73.501,-22.739 ; D1.K@-73.501,-20.453 -73.501,-22.739 ; D2.K@-63.341,-20.453 -63.341,-22.739 ; D5.K@-53.181,-20.453 -53.181,-22.739 ; D8.K@-43.021,-20.453 -43.021,-22.739 ; D11.K@-32.861,-20.467 -32.861,-22.739 ; D14.K@-22.701,-20.453 -22.701,-22.739 ; D15.K@-12.541,-20.453 -12.541,-22.739 ; D16.K@-2.381,-20.453 -2.381,-22.739 ; F15.1@1.143,-36.322 1.143,-22.961 0.921,-22.739 -2.381,-22.739 ; -73.501,-22.739 -63.341,-22.739 ; -63.341,-22.739 -57.321,-22.739 -53.181,-22.739 ; -53.181,-22.739 -49.625,-22.739 -47.085,-22.739 -43.021,-22.739 ; -43.021,-22.739 -36.925,-22.739 -32.861,-22.739 ; -32.861,-22.739 -26.689,-22.739 -22.701,-22.739 ; -22.701,-22.739 -19.145,-22.739 -16.529,-22.739 -15.24,-22.739 -12.541,-22.739 ; -12.541,-22.739 -8.985,-22.739 -6.445,-22.739 -2.381,-22.739
COM_W: F15.2 P5.9 R121.1 | length 14.5
  Bottom Layer w0.508: F15.2@-21.857,-36.322 R121.1@-18.161,-36.322
  Bottom Layer w2.032: P5.9@-32.639,-36.322 F15.2@-21.857,-36.322
CS_R: M1.15 R40.1 U1.88 | length 62
  Top Layer w0.203: M1.15@12.415,-5.397 14.287,-5.397 14.859,-5.969 14.859,-8.001 18.161,-11.303 32.385,-11.303 32.766,-11.684 v2(34.036,-11.684)
  Bottom Layer w0.203: R40.1@32.258,-12.446 33.274,-12.446 v2(34.036,-11.684) 43.434,-11.684 45.466,-13.716 60.325,-13.716 63.361,-10.68 U1.88@63.361,-7.645
D_RXD: R11.2 U1.79 | length 49
  Top Layer w0.203: v2(43.561,-20.574) 43.561,-19.304 44.577,-18.288 v2(44.577,-17.399)
  Bottom Layer w0.203: R11.2@41.783,-35.13 41.783,-32.766 44.831,-29.718 44.831,-23.368 43.561,-22.098 v2(43.561,-20.574) ; v2(44.577,-17.399) 44.577,-16.256 45.847,-14.986 61.468,-14.986 66.445,-10.009 67.334,-10.009 67.857,-9.486 U1.79@67.857,-7.645
D_TXD: R9.2 U1.78 | length 54.1
  Top Layer w0.203: v2(42.672,-20.574) 42.672,-18.034 44.196,-16.51 44.958,-16.51 v2(45.847,-17.399)
  Bottom Layer w0.203: R9.2@39.751,-36.957 41.021,-35.687 41.021,-32.512 44.196,-29.337 44.196,-23.876 42.672,-22.352 v2(42.672,-20.574) ; v2(45.847,-17.399) 45.847,-16.383 46.863,-15.367 61.626,-15.367 66.452,-10.541 67.818,-10.541 68.365,-9.994 U1.78@68.365,-7.645
E_CRS_DV: R31.1 U1.32 | length 5.5
  Bottom Layer w0.203: R31.1@60.186,13.257 60.186,12.395 60.364,12.217 U1.32@60.364,7.849
E_MDC: U1.16 U2.13 | length 37.6
  Top Layer w0.203: v3(55.741,18.364) 57.392,16.713 v3(58.027,16.713)
  Bottom Layer w0.203: U1.16@55.614,1.6 53.582,1.6 52.718,0.737 49.335,0.737 48.502,1.569 48.502,14.847 49.276,15.621 52.197,15.621 54.305,17.729 55.106,17.729 v3(55.741,18.364) ; v3(58.027,16.713) 58.027,18.11 59.444,19.527 U2.13@60.855,19.527
E_MDIO: R21.1 U1.25 U2.12 | length 19.2
  Bottom Layer w0.203: U1.25@55.614,6.096 54.306,7.404 54.306,15.151 54.752,15.597 56.122,15.597 R21.1@56.884,16.359 57.419,15.824 59.424,15.824 61.73,18.13 U2.12@61.73,18.652